# Altium PCB E72.PcbDoc
Units mil, origin at the board's own origin, x right, y up, seen from the top; angles counter-clockwise.
Board outline 970 x 1257 mil, 2 copper layers (Top Layer, Bottom Layer); 12 components, 15 nets, 58 pads, 5 vias.
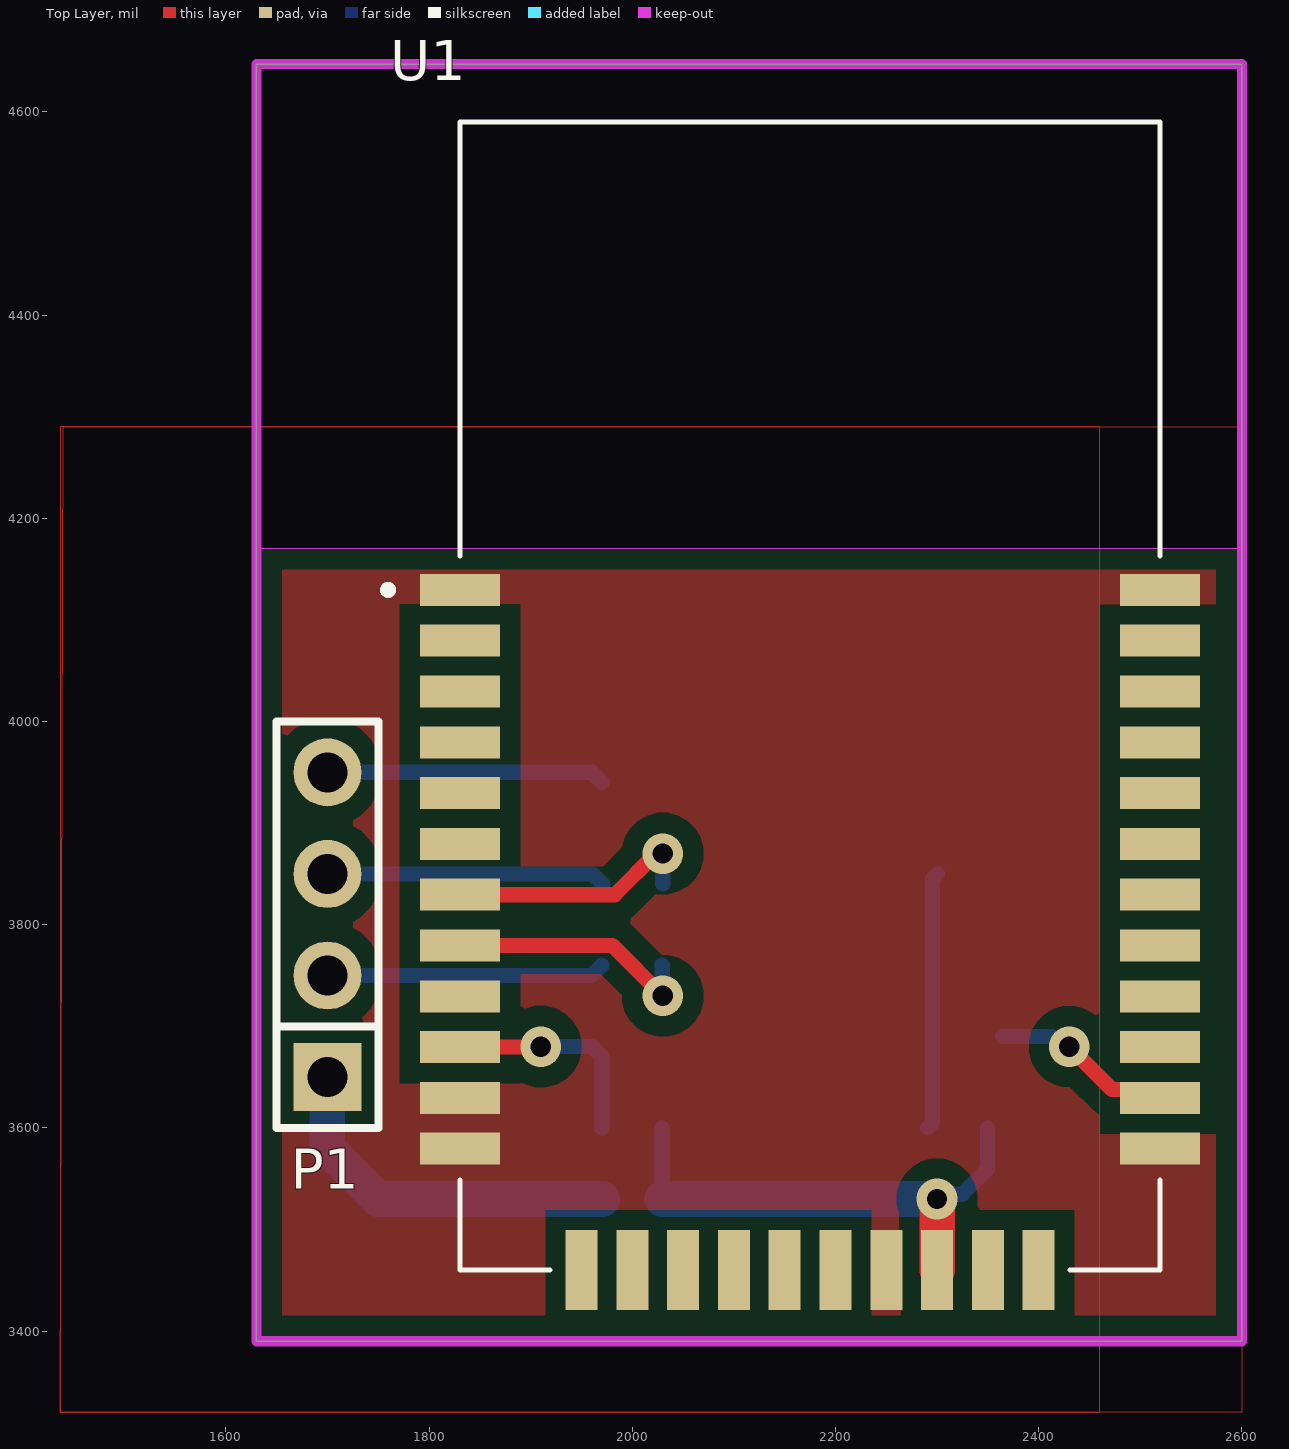
[diagram p0: Top Layer view]
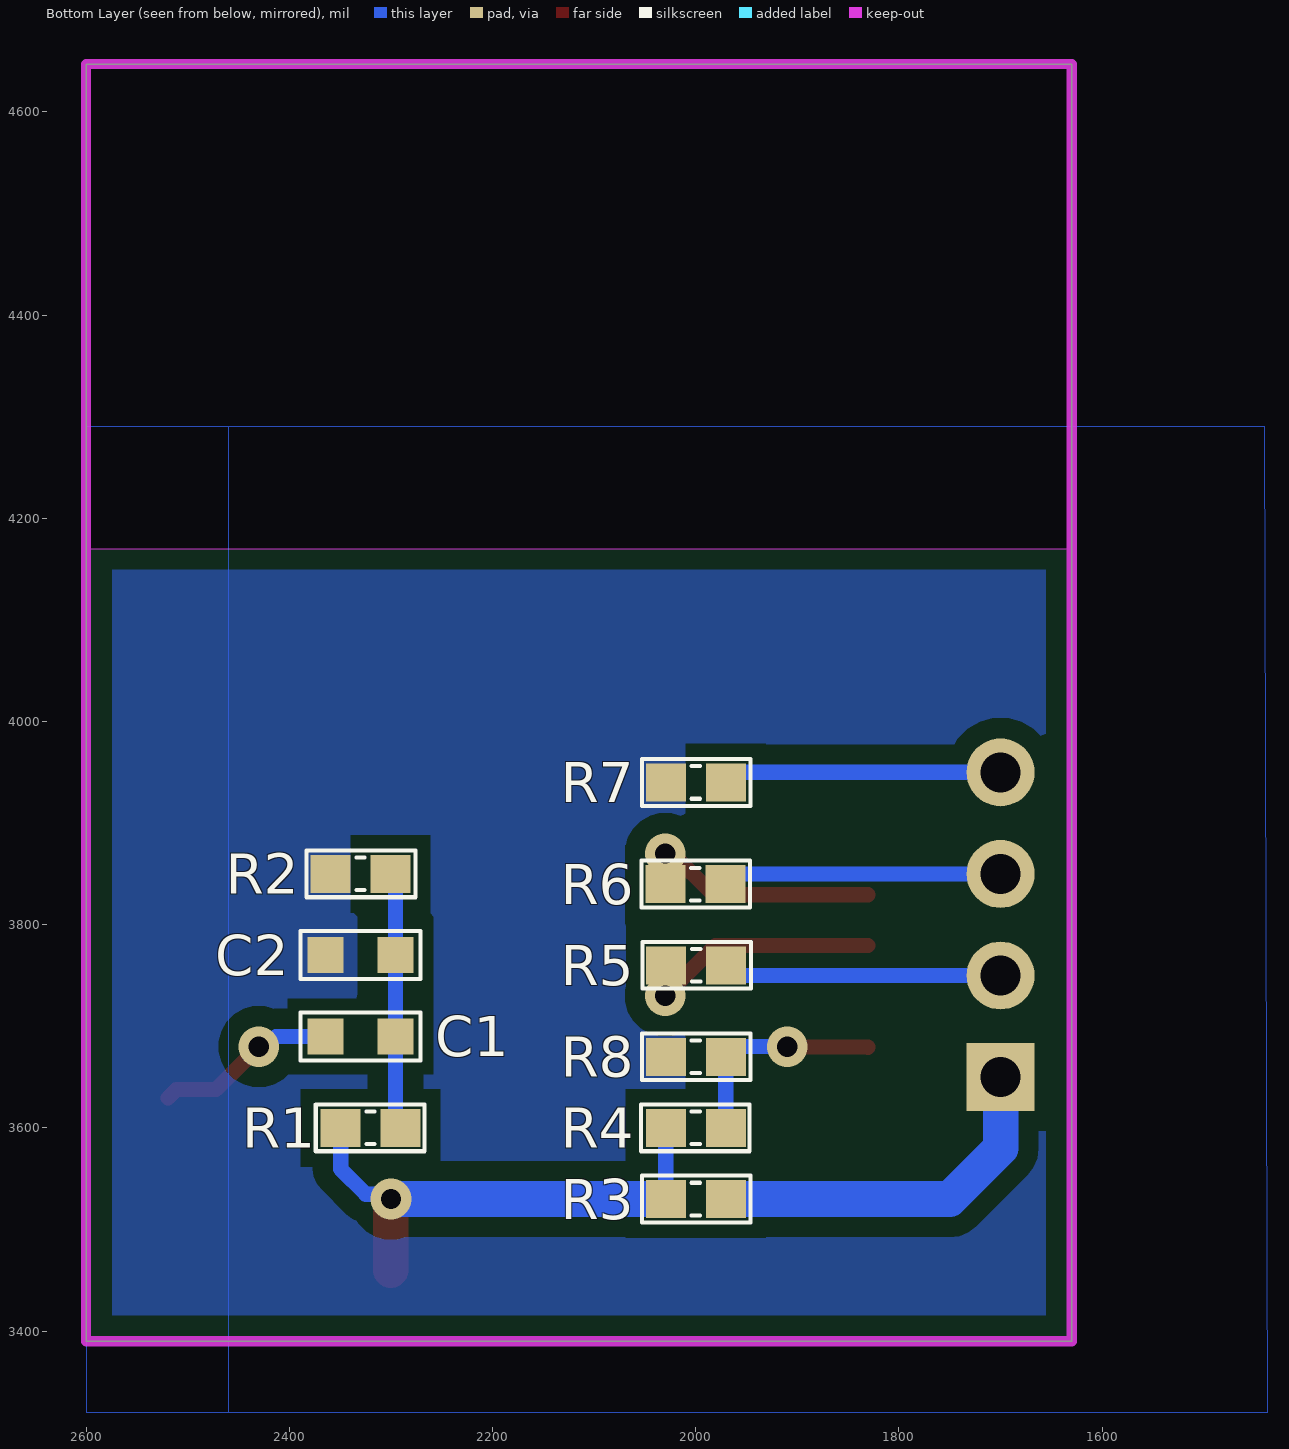
[diagram p1: Bottom Layer view, seen from below]
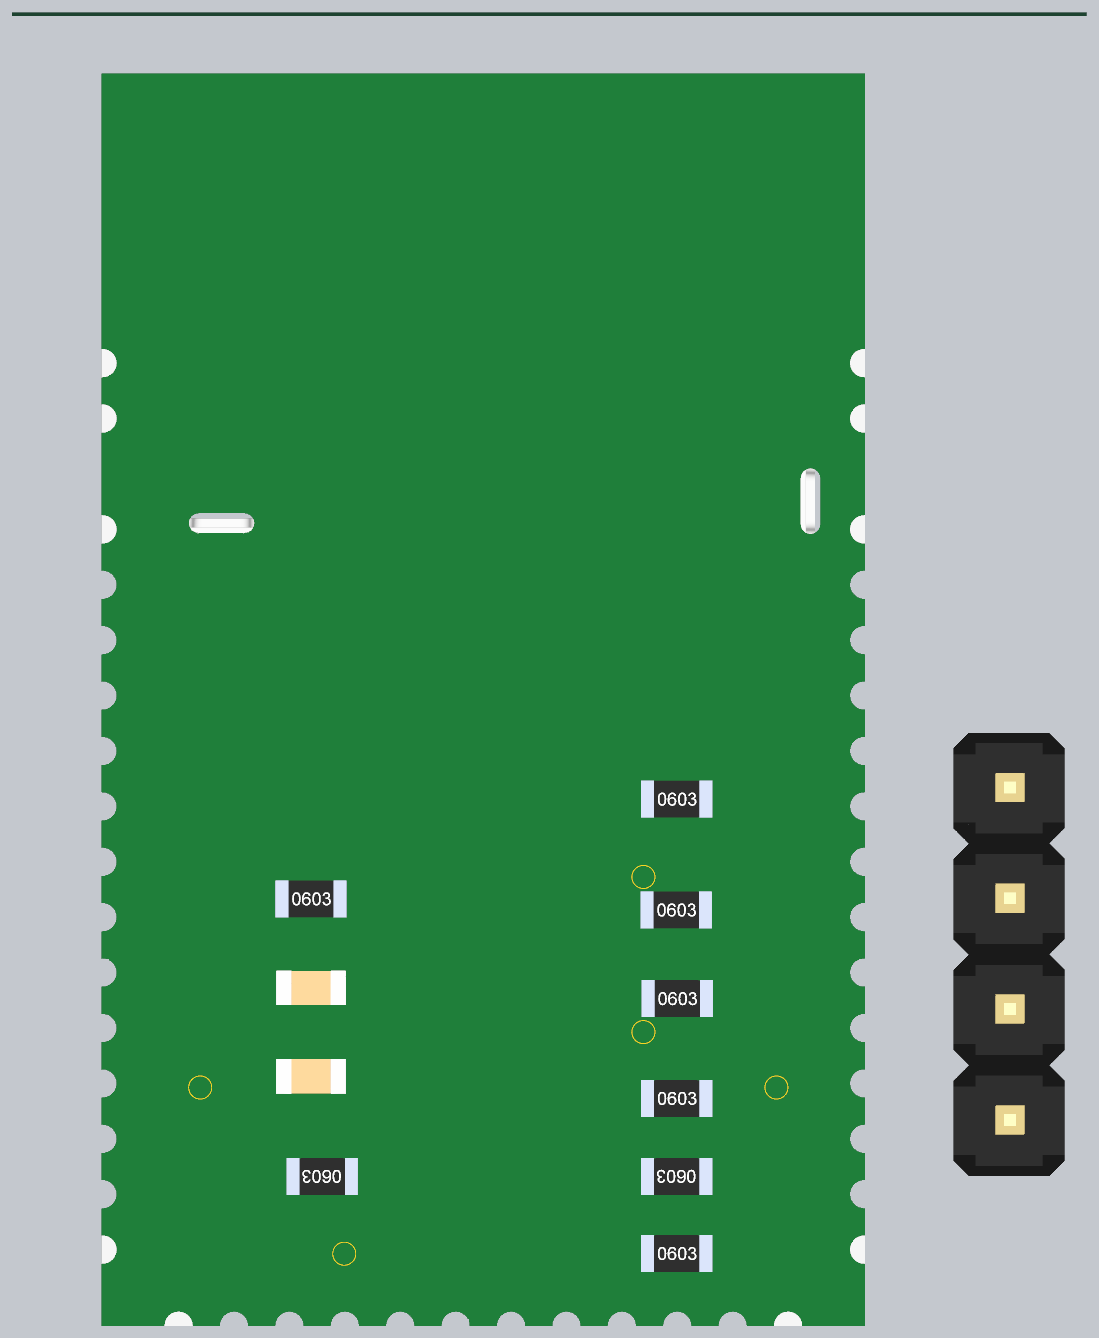
[diagram p2: 3D render of the assembled board from below, using the file's embedded part models]

## Layer stack, top to bottom
Top Solder: solder mask 0.4, Solder Resist, Dk 3.5
Top Layer: signal copper 1.4
Dielectric 1: dielectric 12.6, FR-4, Dk 4.8
Bottom Layer: signal copper 1.4
Bottom Solder: solder mask 0.4, Solder Resist, Dk 3.5

## Board outline
1630,3390 1630,4647 2600,4647 2600,3632 2600,3390
cut-out: 2600,4170 1630,4170 1630,4650 2600,4650

## Design rules (kind name [scope] priority, off if disabled: settings)
Clearance [All] p1: gap=20 ignorepadtopadclearanceinfootprint=TRUE except(0: Arc-Hole Track-Hole SMDPad-Hole THPad-Hole Via-Hole Fill-Hole Poly-Hole Region-Hole Text-Hole; 10: Arc-Arc Arc-Track Arc-SMDPad Arc-THPad Arc-Text Track-Track Track-SMDPad Track-THPad Track-Text SMDPad-SMDPad SMDPad-THPad SMDPad-Text THPad-THPad THPad-Text Via-Text Fill-Text Poly-Text Region-Text Text-Text)
HoleSize [All] p1 off: absolutevalues=TRUE maxlimit=100 minlimit=1 maxpercent=80.000 minpercent=20.000
HoleToHoleClearance [All] p1 off: gap=10 allowstackedmicrovias=TRUE
LayerPairs [All] p1 off: enforce=TRUE
MinimumSolderMaskSliver [All] p1 off: minsoldermaskwidth=10
NetAntennae [All] p1 off: netantennaetolerance=0
PolygonConnect [All] p1: connectstyle=Direct reliefconductorwidth=10 reliefentries=4 polygonreliefangle="90 Angle" airgapwidth=10
RoomDefinition E72 [InComponentClass('E72')] p1: confinementstyle=ConfineIn formatcopy=TRUE lockcomponents=FALSE outline 1630,3390 2600,3390 2600,4647 1630,4647
RoutingVias [All] p1: holewidth=20 width=40 viastyle="Through Hole" minholewidth=20 minwidth=40 maxholewidth=20 maxwidth=40
SilkToSilkClearance [All] p1 off: silktosilkclearance=10
SilkToSolderMaskClearance [IsPad] p1 off: minsilkscreentomaskgap=10 clearancetoexposedcopper=TRUE
SolderMaskExpansion [All] p1: expansion=4 istentingtop=FALSE
Width [All] p1: maxlimit=35 minlimit=10 preferedwidth=15
23 further rules are at their usual default settings.

## Components (designator, comment, footprint, x,y, rotation, side; value= is the part's Value field where it differs from the comment)
C1 "0.1uF" "0603 C" 2330,3690 r0 bottom
C2 "0.1uF" "0603 C" 2330,3770 r180 bottom
P1 "P4" "P4 - 2.54mm" 1700,3650 r90 top
R1 "10k" "RES 0603" 2320,3600 r0 bottom
R2 "10k" "RES 0603" 2330,3850 r180 bottom value=0R
R3 "10k" "RES 0603" 2000,3530 r180 bottom value=0R
R4 "10k" "RES 0603" 2000,3600 r0 bottom
R5 "10k" "RES 0603" 1999.53,3760 r180 bottom value=0R
R6 "10k" "RES 0603" 2000.47,3840 r180 bottom value=0R
R7 "10k" "RES 0603" 2000,3940 r180 bottom value=0R
R8 "10k" "RES 0603" 2000,3670 r180 bottom value=0R
U1 "E72-2G4M20S1E" Module_E72 1725.51,3394.49 r0 top locked

## Footprints (in the part's own frame and the unit in brackets; to place one, negate y for a bottom-side part, rotate by r counter-clockwise, add the part's x,y. Pads: shape width x height; smd on the part's side, far side on the other; paste and mask are expansions set on the pad)
"0603 C" [mm] "Chip Capacitor, 2-Leads, Body 1,60x0,80mm, IPC Medium Density"
  rect 0.9x0.9 smd: 1(-0.875,0) 2(0.875,0)
  silkscreen extent -1.5,-0.6 1.5,0.6, body extent -0.8,-0.4 0.8,0.4, height 0.8
Module_E72 [mm]
  rect 2x0.8 smd: 1(2.667,18.669) 2(2.667,17.399) 3(2.667,16.129) 4(2.667,14.859) 5(2.667,13.589) 6(2.667,12.319) 7(2.667,11.049) 8(2.667,9.779) 9(2.667,8.509) 10(2.667,7.239) 11(2.667,5.969) 12(2.667,4.699) 23(20.167,4.699) 24(20.167,5.969) 25(20.167,7.239) 26(20.167,8.509) 27(20.167,9.779) 28(20.167,11.049) 29(20.167,12.319) 30(20.167,13.589) 31(20.167,14.859) 32(20.167,16.129) 33(20.167,17.399) 34(20.167,18.669)
  rect 0.8x2 smd: 13(5.702,1.664) 14(6.972,1.664) 15(8.242,1.664) 16(9.512,1.664) 17(10.782,1.664) 18(12.052,1.664) 19(13.322,1.664) 20(14.592,1.664) 21(15.862,1.664) 22(17.132,1.664)
  silkscreen extent 0.77,1.66 20.17,30.36, body extent 2.65,1.79 20.15,30.49, height 2.5
"P4 - 2.54mm" [mm]
  rect 1.7x1.7 hole 1: 1(0,0)
  round 1.7 hole 1: 2(2.54,0) 3(5.08,0) 4(7.62,0)
  silkscreen extent -1.27,-1.27 8.89,1.27, body extent -1.27,-1.27 8.89,1.27, height 9.21
"RES 0603" [mm] "Chip Capacitor, 2-Leads, Body 1,60x0,80mm, IPC Medium Density"
  rect 1x0.95 smd mask+0.076: 1(-0.75,0) 2(0.75,0)
  silkscreen extent -1.35,-0.58 1.37,0.58, body extent -0.82,-0.42 0.82,0.43, height 0.44

## Part data
C1 C2: library part "0603 0.1uF CER", "CAP CER 0.1uF 50V 10% 0603 SMD", PACKAGE=SMD, VOLTAGE + TOLE="50V 10%", ComponentLink1Description="New link", CREATOR=MMUOP, DATE=04-Mar-21, FP=0603
R1 R4: library part "0603 10k 1%", "10k 1% 0603 SMD", PACKAGE=SMD, VOLTAGE + TOLE=1%, ComponentLink1Description="New link", CREATOR=MMUOP, DATE=04-Mar-21, FP=0603, PN=C98220
R2 R3 R5 R6 R7 R8: library part "0603 10k 1%", "0R 1% 0603 SMD", PACKAGE=SMD, VOLTAGE + TOLE=1%, ComponentLink1Description="New link", CREATOR=MMUOP, DATE=04-Mar-21, FP=0603, PN=C98220
U1: "CC2652P Multifunctional SoC wireless module", PACKAGE=Package, Availability=Unavailable, Check_prices=https://www.snapeda.com/parts/E72-2G4M20S1E/EBYTE/view-part/5825256/?ref=eda, MF=EBYTE, MP=E72-2G4M20S1E, Price=None, SnapEDA_Link=https://www.snapeda.com/parts/E72-2G4M20S1E/EBYTE/view-part/5825256/?ref=snap

## Via types
v1: diameter 40, hole 20, Top Layer to Bottom Layer, tented both sides, 5 vias

## Nets (pads, with @x,y where several pads share a name; then routed paths per layer and width w, separated by ;. In a path a pad name is that pad's centre, name@x,y a point inside that pad or via, vN(x,y) a via of type N, cw(c..) or ccw(c..) an arc to the next point about the centre after c; other vN are vias at no path point)
3V3: R1.2 R3.1 R4.2 U1.20 | length 512.7
  Top Layer w35: U1.20 v1(2300,3530)
  Bottom Layer w15: R3.1 R4.2 ; v1(2300,3530) 2304.78,3534.78 2324.78,3534.78 2349.53,3559.53 R1.2
  Bottom Layer w35: R3.1 v1(2300,3530)
E72_FLASH: R4.1 R8.2 U1.10 | length 214.3
  Top Layer w15: U1.10 1830.77,3679.74 1909.74,3679.74 v1(1910,3680)
  Bottom Layer w15: v1(1910,3680) 1950,3680 1960.47,3680 1965.47,3675 R8.2 R4.1
GND: C2.1 R2.1 R7.1 R8.1 U1.1 U1.11 U1.12 U1.19 U1.23 U1.34
JTAG_TCLK: U1.14
JTAG_TDI: U1.16
JTAG_TDO: U1.15
JTAG_TMSC: U1.13
NetC1_1: C1.1 C2.2 R1.1 R2.2 | length 254.1
  Bottom Layer w15: R1.1 2295.47,3605 2295.47,3845 R2.2
NetC1_2: C1.2 U1.24 | length 180.1
  Top Layer w15: v1(2430,3680) 2472.26,3637.74 2511.24,3637.74 U1.24
  Bottom Layer w15: C1.2 2413.24,3690 2423.24,3680 v1(2430,3680)
NetP1_1: P1.1 R3.2 | length 361.2
  Bottom Layer w35: P1.1 1700,3580 1750,3530 R3.2
NetP1_2: P1.2 R5.2 | length 274.1
  Bottom Layer w15: P1.2 1960,3750 R5.2
NetP1_3: P1.3 R6.2 | length 275.1
  Bottom Layer w15: P1.3 1960.94,3850 R6.2
NetP1_4: P1.4 R7.2 | length 274.6
  Bottom Layer w15: P1.4 1960.47,3950 R7.2
ZRX: R6.1 U1.7 | length 246.3
  Top Layer w15: U1.7 1982.72,3829.49 2023.24,3870 v1(2030,3870)
  Bottom Layer w15: R6.1 v1(2030,3870)
ZTX: R5.1 U1.8 | length 250.4
  Top Layer w15: U1.8 1980.51,3779.49 v1(2030,3730)
  Bottom Layer w15: R5.1 2029.53,3759.53 2029.53,3730.47 v1(2030,3730)
pads on no net: U1.2 U1.3 U1.4 U1.5 U1.6 U1.9 U1.17 U1.18 U1.21 U1.22 U1.25 U1.26 U1.27 U1.28 U1.29 U1.30 U1.31 U1.32 U1.33

## Polygon pours and split planes (outlines as drawn)
GND on Top Layer "GND_L01_P004" (solid, remove dead copper, pour order 4): 1630,4170 2600,4170 2600,3390 1630,3390
GND on Top Layer "NONET_L01_P002" (solid, remove dead copper, shelved, pour order 2): 1440.07,4290 2600,4290 2600,3320 1437,3320
GND on Top Layer "NONET_L01_P000" (solid, remove dead copper, shelved, pour order 0): 1437,4290 1437,3320 2460,3320 2460,4290
GND on Bottom Layer "GND_L02_P005" (solid, remove dead copper, pour order 5): 1630,4170 2600,4170 2600,3390 1630,3390
GND on Bottom Layer "NONET_L02_P003" (solid, shelved, pour order 3): 1440.07,4290 2600,4290 2600,3320 1437,3320
GND on Bottom Layer "NONET_L02_P001" (solid, remove dead copper, shelved, pour order 1): 1440.07,4290 2460,4290 2460,3320 1437,3320

## Keep-outs
Keep-Out Layer:
  the board outline again, w10